# Altium PCB THERMO_RTD_SENSOR_2CH.PcbDoc (part 2 of 3)
Units mm, origin at the board's own origin, x right, y up, seen from the top; angles counter-clockwise.
Board outline 24 x 76.5 mm, 4 copper layers (L1, P2, L3, L4), stack 1.512 mm thick; 154 components, 120 nets, 487 pads, 253 vias.
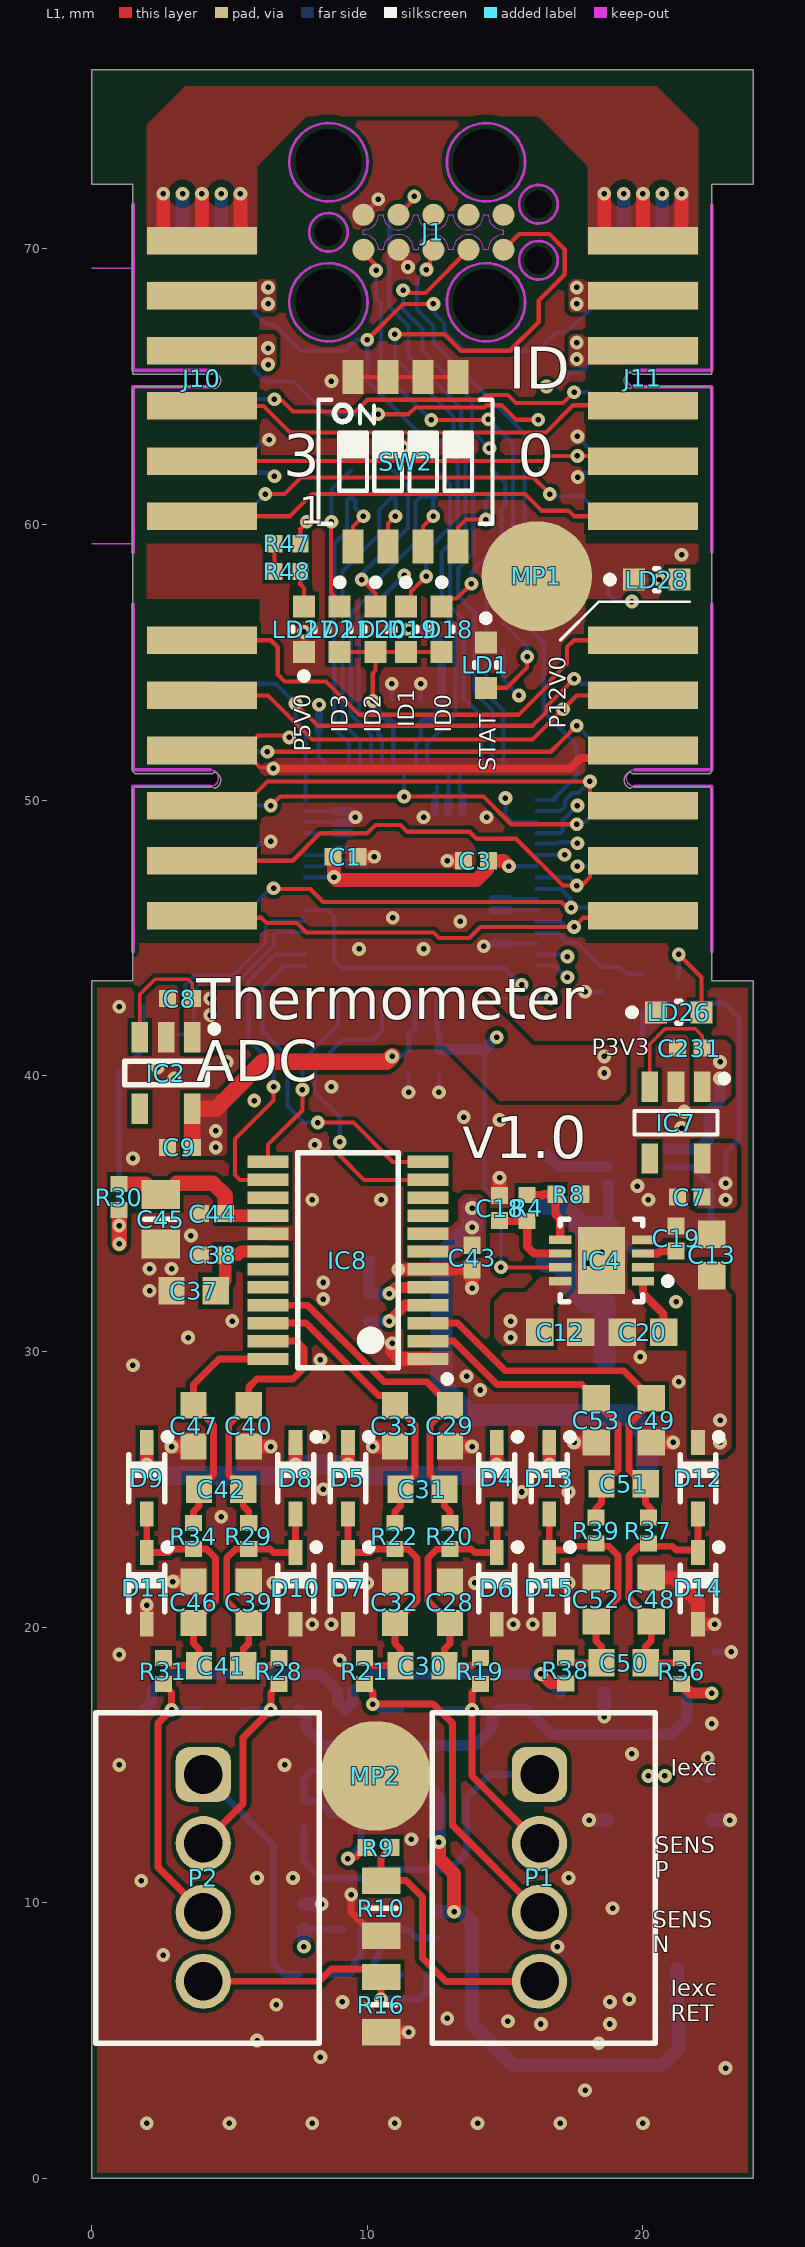
[diagram p0: L1 view]

## Part data (continued)
SW2: library part SW_OMRON_A6H-4102, "4 Ways SPST DIP Switch", Manufacturer=OMRON, Manufacturer Part Number=A6H-4102, Author="CERN DEM JLC", Component Type=Standard, ComponentHeight=1.45mm, CreateDate=17.12.2013, Family=Switch, HelpURL=\\cern.ch\dfs\Applications\Altium\Datasheets\SW_OMRON_A6H-4102.pdf, LatestRevisionDate=17.12.2013, Mounted=Yes, PackageDescription="Pitch 1.27mm, Body 6.31 x 4.5mm, 4 Ways SPST Surface-Mounting DIP Switch, OMRON A6H", Part Description="4 Ways Ultra-low Profile, Half-pitch, SPST DIP Switch with Seal Tape, Rating 25mA 24VDC", Part Number=SW_OMRON_A6H-4102, Pin Count=8, PressFit=No, Sense=No, SMD=Yes, Socket=No, Status=None

## Via types
v1: diameter 0.5, hole 0.2, L1 to L4, tented both sides, 253 vias

## Nets (pads, with @x,y where several pads share a name; then routed paths per layer and width w, separated by ;. In a path a pad name is that pad's centre, name@x,y a point inside that pad or via, vN(x,y) a via of type N, cw(c..) or ccw(c..) an arc to the next point about the centre after c; other vN are vias at no path point)
CS_ID0: IC1.5 R26.2 SW2.4 | length 14.6
  L1 w0.15: SW2.4@13.295,59.2 13.295,59.895 13.575,60.175 v1(14.295,60.175)
  L3 w0.15: v1(11.34,58.157) 11.783,58.6 12.29,58.6 13.467,59.777 13.893,59.777 14.291,60.175 v1(14.295,60.175)
  L4 w0.15: IC1.5@10.54,51.2 10.54,52.244 10.417,52.367 10.417,52.475 9.7,53.192 9.7,56.517 v1(11.34,58.157) ; v1(14.295,60.175) 14.295,60.865 R26.2@14.491,61.062
CS_ID1: IC1.4 R27.2 SW2.3 | length 13.7
  L1 w0.15: SW2.3@12.025,59.2 12.025,59.931 v1(12.394,60.3)
  L4 w0.15: IC1.4@10.14,51.2 10.14,52.36 9.4,53.1 9.4,56.761 9.939,57.3 10.5,57.861 10.5,58.1 11.751,59.351 11.751,60.813 11.958,61.02 R27.2@12.493,61.02 12.394,60.921 v1(12.394,60.3)
CS_ID2: IC1.3 R32.2 SW2.2 | length 12.8
  L1 w0.15: SW2.2@10.755,59.2 10.755,60.033 v1(11.022,60.3)
  L4 w0.15: IC1.3@9.74,51.2 9.74,52.16 9.1,52.8 9.1,58.3 10.432,59.632 10.432,60.532 10.92,61.02 R32.2@10.94,61.02 11.022,60.937 v1(11.022,60.3)
CS_ID3: IC1.2 R33.2 SW2.1 | length 12.5
  L1 w0.15: SW2.1@9.485,59.2 9.485,59.925 v1(9.86,60.3)
  L4 w0.15: IC1.2@9.34,51.2 9.34,52.06 8.8,52.6 8.8,59.3 9.264,59.764 9.264,60.87 R33.2@9.414,61.02 9.564,60.869 9.564,60.596 v1(9.86,60.3)